# Allegro board CarteV4bis.brd
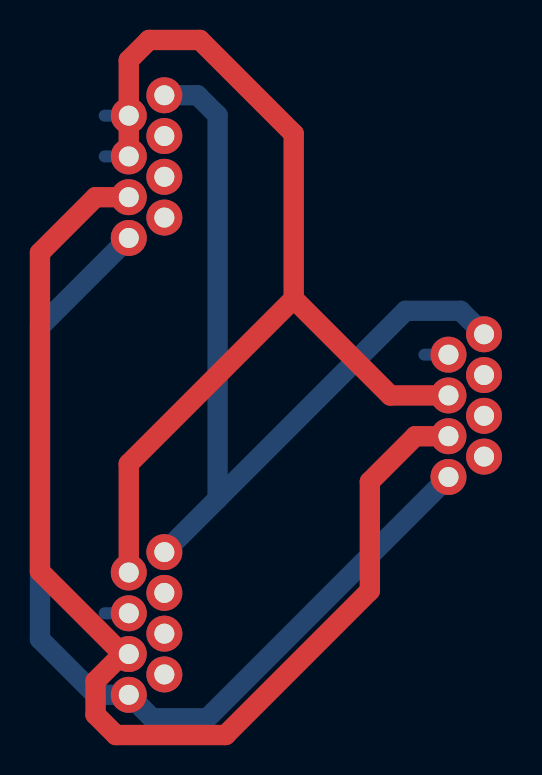
[diagram p0: board, top side]
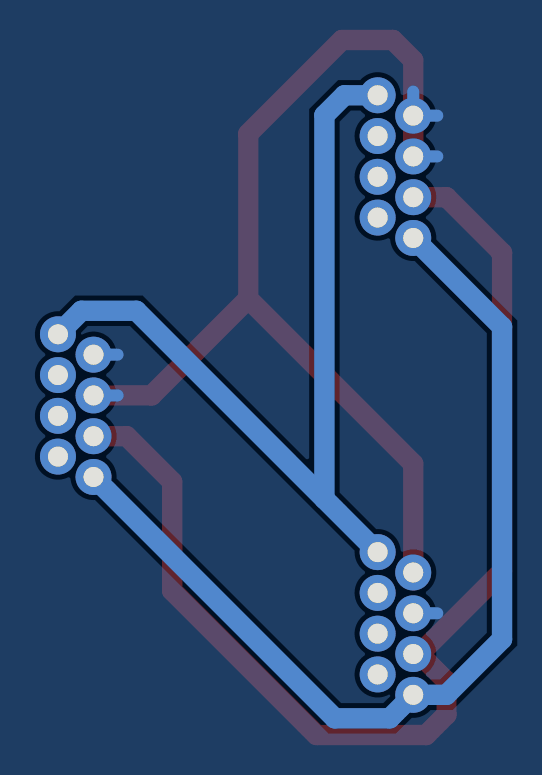
[diagram p1: board, bottom side, seen from below]

No outline. copper layers: TOP, BOTTOM. Coordinates in mm from the lowest, leftmost part position.

## Design rules (mm)
constraint set DEFAULT: min track width 1.016

## Placement (name value [footprint] x y rotation side)
U12  RJ-45  [RJ45]  0 22.86 90 top
U13  RJ-45  [RJ45]  0 0 90 top
U14  RJ-45  [RJ45]  17.78 81.28 270 top

## Library data of the parts
U12-U14 = RJ-45

## Footprints (pads in the part's own frame, mm; a bottom-side part is the same pattern mirrored in y, then rotated)
RJ45
  round 1.8 hole 1: 1(31.62,0) 2(33.66,0) 3(35.7,0) 4(37.74,0) 5(32.64,-1.78) 6(34.68,-1.78) 7(36.72,-1.78) 8(38.76,-1.78)

## Nets
24V: U12.8(PIN_8) U13.8(PIN_8) U14.1
0: U12.3 U12.4 U13.3 U13.4 U14.5 U14.6
CAN_H: U12.1 U13.1 U14.8(PIN_8)
CAN_L: U12.2 U13.2 U14.7

Pads without a net: U12 5 6 7; U13 5 6 7; U14 2 3 4

## Routing (per net, layer and track width the routed paths; a pad name or vN(x,y) marks a point on that pad's centre or on a via; arc(x,y) is an arc through that point)
24V: length 43.8
  BOTTOM w1.016: 4.44,41.42 13.86,50.84 16.6,50.84 U14.1 ; 4.44,41.42 4.44,60.62 3.44,61.62 U12.8 ; 4.44,41.42 U13.8
0: length 57.8
  TOP w1.016: 8.25,51.43 8.25,59.69 3.56,64.39 1.02,64.39 0,63.37 U12.4 U12.3 ; 8.25,51.43 13.09,46.6 U14.6 ; 8.25,51.43 0,43.18 U13.4
  BOTTOM w0.6: -1.21,58.56 U12.3 ; 14.79,48.64 U14.5 ; 14.79,46.6 U14.6 ; -1.21,60.6 U12.4 0,61.81 ; -1.21,35.7 U13.3
CAN_H: length 49
  BOTTOM w1.016: U12.1 -4.45,50.04 -4.45,34.4 -1.66,31.62 U13.1 1.18,30.44 3.92,30.44 U14.8
CAN_L: length 58.8
  TOP w1.016: -0.31,33.66 U13.2 ; -0.31,33.66 -1.66,32.31 -1.66,30.62 -0.65,29.61 4.84,29.61 12.06,36.83 12.06,42.29 14.34,44.56 U14.7 ; -0.31,33.66 -4.45,37.79 -4.45,53.74 -1.66,56.52 U12.2

## Copper pours and planes (outline as drawn; the poured copper is in the pictures)
0 on BOTTOM: -10.16,69.22 -10.16,21.59 29.21,21.59 29.21,69.22
